# EAGLE board OSDK_USB-C (EAGLE 9.6.2)
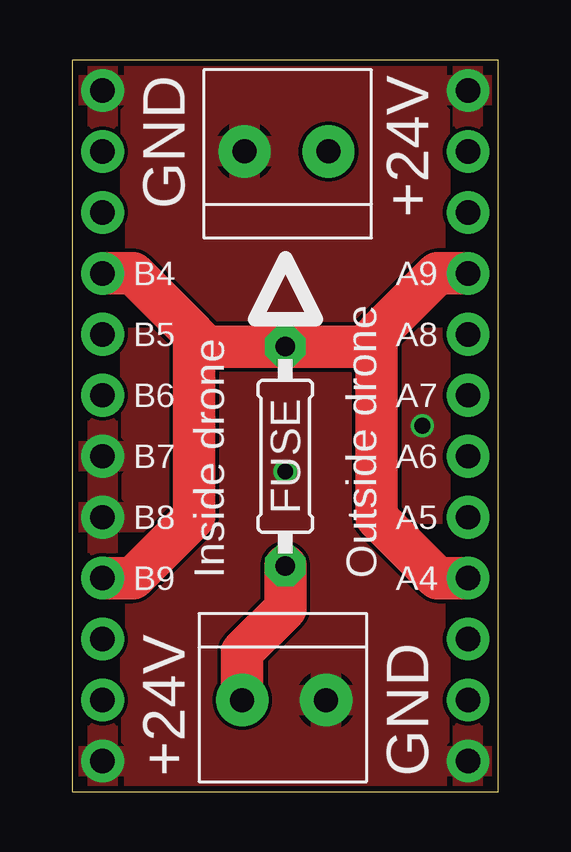
[diagram p0: board, top side]
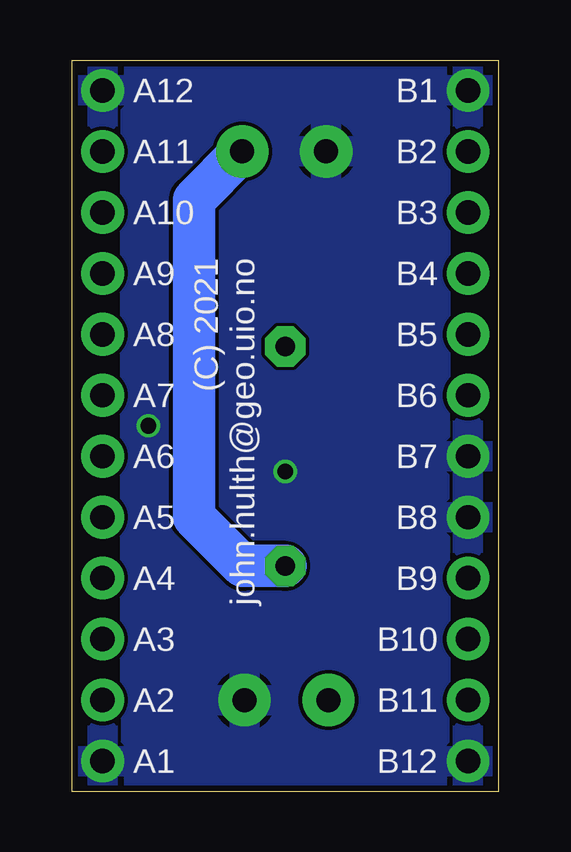
[diagram p1: board, bottom side, seen from below]

Size 17.78 x 30.48 mm. Coordinates in mm from the lower left corner, seen from the top.
Outline: 0,0 17.78,0 17.78,30.48 0,30.48 0,0
Copper layers (1*16): Top 0.018mm / dielectric 1.55mm / Bottom 0.018mm
Design rules "eC_2Layer_PClass6_BaseCopperO18_eCDefault": minimum track width 0.15mm, minimum drill 0.35mm, track to track 0.15mm, track to pad 0.15mm, pad to pad 0.15mm, via to via 0.15mm, smd to smd 0mil, copper to edge 0.25mm, drill to drill 0.35mm, minimum pad ring 0.175mm, minimum via ring 0.125mm, stop-mask expansion 0mil, vias tented up to drill 0.45mm, thermal gap 0.2mm

## Footprints (pad centres in the part's own frame; a part is rotated, then mirrored left to right if it is on the bottom)
1X12-CB = drill 1.016 pad 1.778: 1 -13.97,0; 2 -11.43,0; 3 -8.89,0; 4 -6.35,0; 5 -3.81,0; 6 -1.27,0; 7 1.27,0; 8 3.81,0; 9 6.35,0; 10 8.89,0; 11 11.43,0; 12 13.97,0
0207/9 = drill 0.813 pad 1.676 octagon: 1 -4.572,0; 2 4.572,0
ADAFRUIT_1X2-3.5MM = drill 1 pad 2.184: 1 1.8,0; 2 -1.7,0

## Placement (x,y rotation side)
A  [1X12-CB]  16.51,15.24 90 top
B  [1X12-CB]  1.27,15.24 270 top
FUSE  [0207/9]  8.89,13.97 90 top
J1  ADAFRUIT_1X2-3.5MM  [ADAFRUIT_1X2-3.5MM]  8.89,26.67 0 top
J2  ADAFRUIT_1X2-3.5MM  [ADAFRUIT_1X2-3.5MM]  8.89,3.81 180 top

## Library data of the parts
A B FUSE = adafruit
J1 J2 = DCDC-Relay

## Nets
A2: A.2
A3: A.3
A5: A.5
A6: A.6
A7: A.7
A8: A.8
A10: A.10
A11: A.11
B2: B.2
B3: B.3
B5: B.5
B6: B.6
B10: B.10
B11: B.11
GND: A.1 A.12 B.1 B.7 B.8 B.12 J1.2 J2.2
MAIN: A.4 A.9 B.4 B.9 FUSE.2
MIAN-F: FUSE.1 J1.1 J2.1

## Tracks (layer width: path | path; a pad name or v marks a point on that pad's centre or on a via)
GND  (via drill 0.65)
  other vias: 14.61,15.24 8.89,13.34
  pour Bottom: 0,0 0,31.75 17.78,31.75 17.78,0
  pour Top: 0,0 0,33.02 17.78,33.02 17.78,0
MAIN
  Top 1.778: B.9 2.54,8.89 5.08,11.43 5.08,19.05 | B.4 2.54,21.59 5.08,19.05 | A.9 15.24,21.59 12.7,19.05 | 12.7,19.05 12.7,11.43 15.24,8.89 A.4 | 5.08,19.05 5.59,18.54 FUSE.2 12.19,18.54 12.7,19.05
MIAN-F
  Top 1.778: J2.1 7.09,5.82 8.89,7.62 FUSE.1
  Bottom 1.778: J1.1 12.7,24.66 12.7,11.43 10.67,9.4 FUSE.1

## Text on the board
tPlace: GND | +24V | B4 | A9 | B5 | A8 | B6 | A7 | B7 | A6 | B8 | A5 | B9 | Inside drone | Outside drone | A4 | +24V | GND
bPlace: B1 | A12 | B2 | A11 | B3 | A10 | B4 | (C) 2021 / john.hulth@geo.uio.no | A9 | B5 | A8 | B6 | A7 | B7 | A6 | B8 | A5 | B9 | A4 | B10 | A3 | B11 | A2 | B12 | A1